# Altium PCB Ad Hoc Node PCB_A.PcbDoc
Units mm, origin at the board's own origin, x right, y up, seen from the top; angles counter-clockwise.
Board outline 152.4 x 101.6 mm, 2 copper layers (Top Layer, Bottom Layer); 35 components, 36 nets, 184 pads, 16 vias.
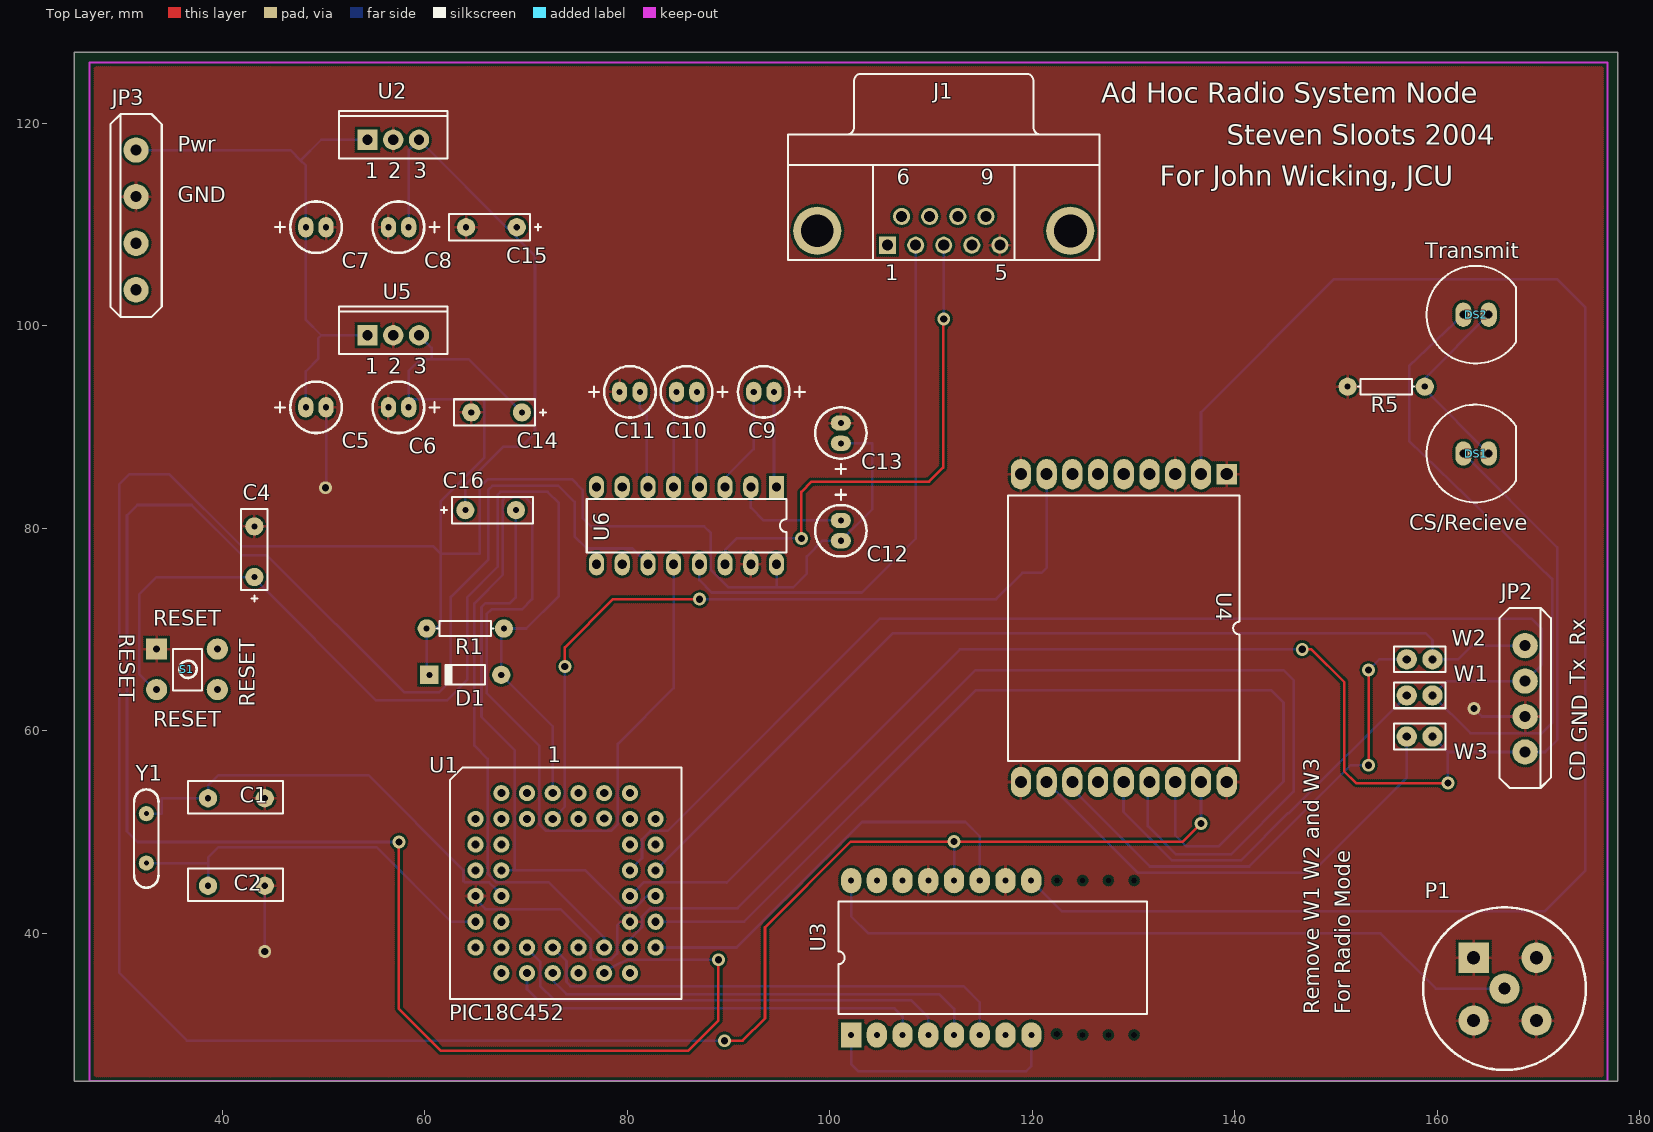
[diagram p0: Top Layer view]
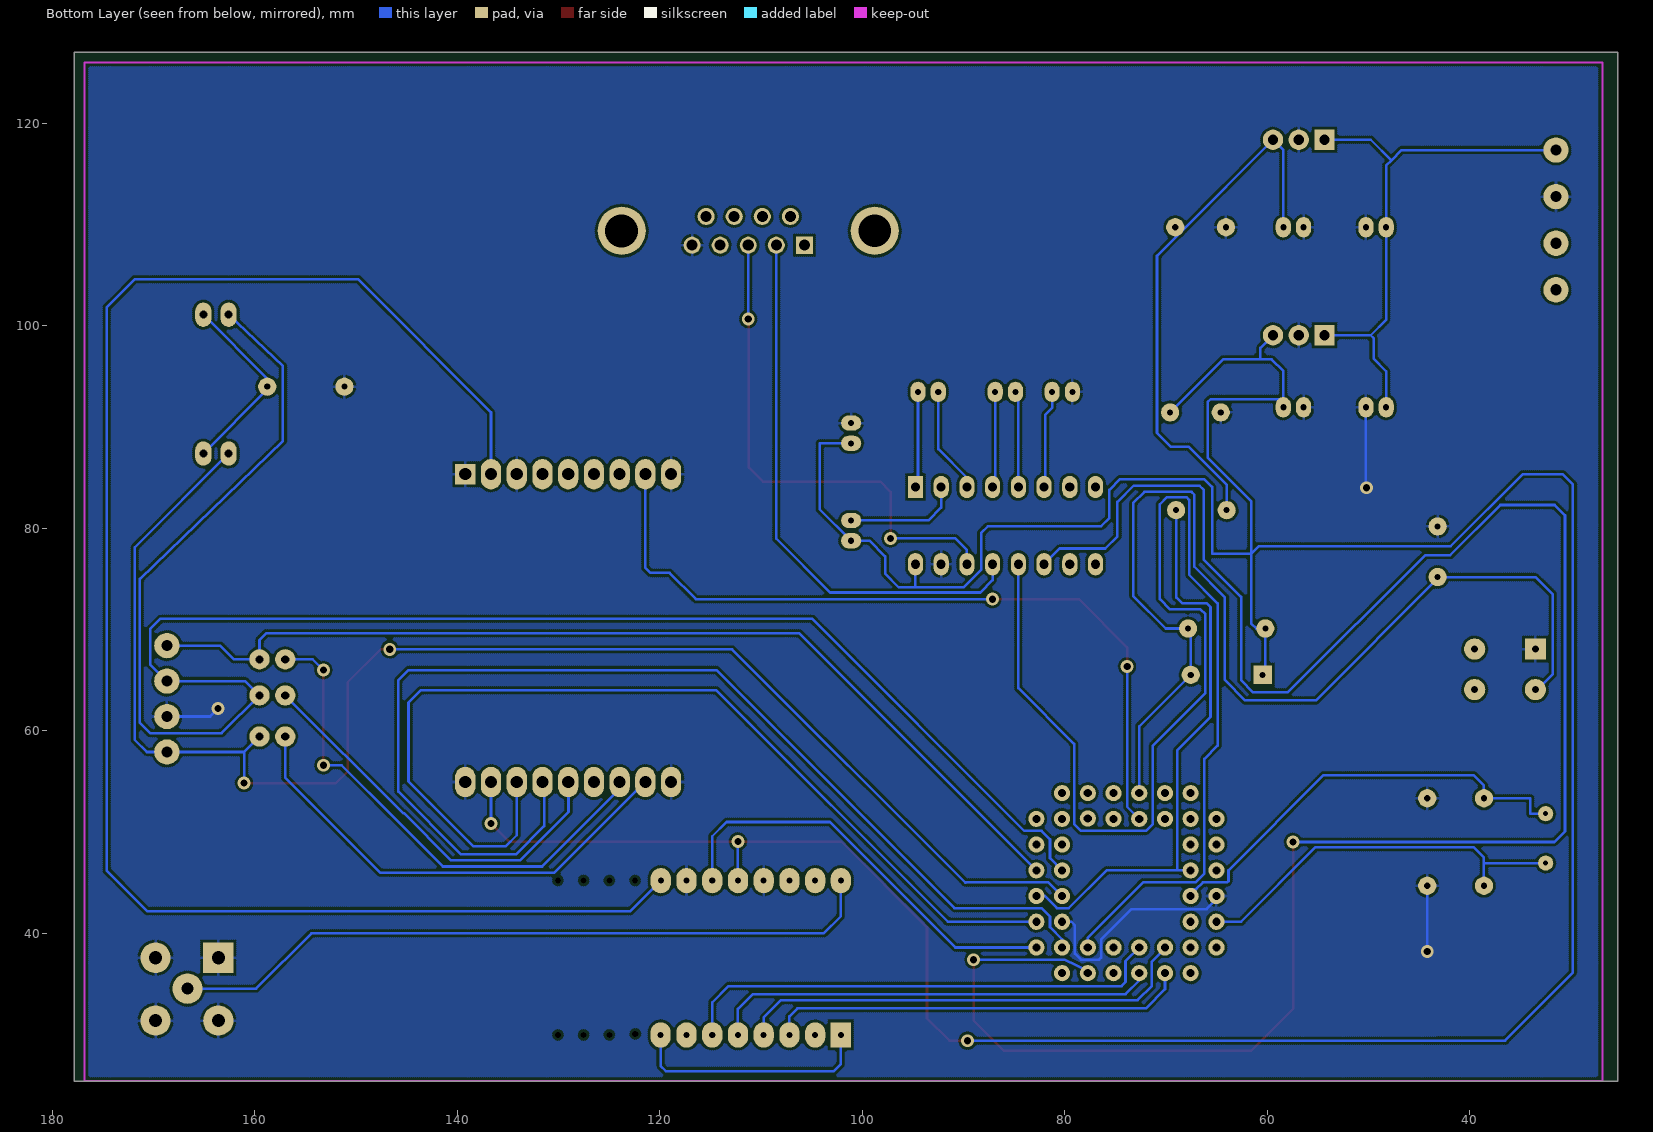
[diagram p1: Bottom Layer view, seen from below]

## Layer stack, top to bottom
Top Layer: signal copper 0.0356
Dielectric: dielectric 0.32, FR-4, Dk 4.8
Bottom Layer: signal copper 0.0356

## Board outline
25.4,25.4 177.8,25.4 177.8,127 25.4,127

## Design rules (kind name [scope] priority, off if disabled: settings)
Clearance [All] p1: gap=0.254
ComponentClearance [All] p1: gap=0.254 collisioncheckmode=0
HoleSize [All] p1: absolutevalues=TRUE maxlimit=5 minlimit=0.025 maxpercent=80.000 minpercent=20.000
PermittedLayers PermittedLayers_1 [All] p1: toplayerpermitted=FALSE bottomlayerpermitted=TRUE
PolygonConnect [All] p1: connectstyle=Relief reliefconductorwidth=0.254 reliefentries=4 polygonreliefangle="90 Angle"
RoutingLayers [All] p1: top layer="Not Used" bottom layer=Any
RoutingVias [All] p1: holewidth=0.711 width=1.27 viastyle="Through Hole" minholewidth=0.711 minwidth=1.27 maxholewidth=0.711 maxwidth=1.27
SolderMaskExpansion [All] p1: expansion=0.102
TestPointUsage [All] p1: valid=0 allowmultiple=FALSE
Testpoint [All] p1: side=15 testpointundercomponent=TRUE minsize=1.016 maxsize=2.54 preferedsize=1.524 minholesize=0 maxholesize=1.016 preferedholesize=0.813 testpointgrid=0.025 style=1023 order=1234567890
Width [All] p1: maxlimit=0.35 minlimit=0.254 preferedwidth=0.254 minimp=50.000000 maximp=50.000000 favimp=50.000000
15 further rules are at their usual default settings.

## Components (designator, comment, footprint, x,y, rotation, side; value= is the part's Value field where it differs from the comment)
C1 "Cap" "5.6mm Ceramic Cap" 38.608,53.34 r0 top
C2 "Cap" "5.6mm Ceramic Cap" 38.608,44.704 r0 top
C4 "0.1uF" "5mm Tant. Cap" 43.18,75.184 r90 top
C5 "Cap" "2mm Pol. Cap" 48.26,91.948 r0 top
C6 "Cap" "2mm Pol. Cap" 58.42,91.948 r180 top
C7 "Cap" "2mm Pol. Cap" 48.26,109.728 r0 top
C8 "Cap" "2mm Pol. Cap" 58.42,109.728 r180 top
C9 "Cap Pol1" "2mm Pol. Cap" 94.488,93.472 r180 top
C10 "Cap Pol1" "2mm Pol. Cap" 86.868,93.472 r180 top
C11 "Cap Pol1" "2mm Pol. Cap" 79.248,93.472 r0 top
C12 "Cap Pol1" "2mm Pol. Cap" 101.092,80.772 r270 top
C13 "Cap Pol1" "2mm Pol. Cap" 101.092,88.392 r90 top
C14 "Cap" "5mm Tant. Cap" 69.596,91.44 r180 top
C15 "Cap" "5mm Tant. Cap" 69.088,109.728 r180 top
C16 "Cap" "5mm Tant. Cap" 64.008,81.788 r0 top
D1 "1N914 Diode" DIO7.1-3.9X1.9 64.008,65.532 r180 top
DS1 "LED1" LED 162.56,87.376 r0 top
DS2 "LED1" LED 162.56,101.092 r0 top
J1 "D Connector 9" DSUB1.385-2H9 111.252,118.872 r0 top
JP2 "Header 4" "4 Way Terminal Block"#1 168.656,57.912 r90 top (schematic designator JP1)
JP3 "Header 4" "4 Way Terminal Block"#2 31.496,117.348 r270 top
P1 "BNC" "PCB BNC Connector - duplicate" 163.576,37.592 r0 top
R1 "Res1" AXIAL-0.3 64.008,70.104 r180 top
R5 "Res1" AXIAL-0.3 154.94,93.98 r180 top
S1 "SW-PB" "Reset Switch - duplicate" 33.528,68.072 r0 top
U1 "PIC18C452/JW" "PIC18C452_PLCC - duplicate" 65.024,53.848 r0 top
U2 "LM340T5.0" SFM-T3/A4.7V 56.896,118.364 r0 top
U3 "AD8369" "24 pin DIP socket for TSSOP" 102.108,29.972 r90 top
U4 "X2010 NBFM Transceiver" X2010 139.192,85.344 r270 top
U5 "LM340T5.0" SFM-T3/A4.7V 56.896,99.06 r0 top
U6 "MAX232EPE" DIP-16/X1.5 85.852,80.264 r180 top
W1 "Tx Jumper" RAD-0.1 159.512,63.5 r180 top
W2 "Rx Jumper" RAD-0.1 159.512,67.056 r180 top
W3 "CD Jumper" RAD-0.1 159.512,59.436 r180 top
Y1 "XTAL" XTAL 32.512,51.816 r270 top

## Footprints (in the part's own frame and the unit in brackets; to place one, negate y for a bottom-side part, rotate by r counter-clockwise, add the part's x,y. Pads: shape width x height; smd on the part's side, far side on the other; paste and mask are expansions set on the pad)
"2mm Pol. Cap" [mm]
  oval 1.5x2 hole 0.6: 1(0,0) 2(2,0)
  silkscreen extent -3.05,-2.54 3.56,2.54
"4 Way Terminal Block"#1 [mm]
  round 2.5 hole 1.1: 0(0,0) 1(3.5,0) 2(7,0) 3(10.5,0)
  silkscreen extent -3.56,-2.54 14.22,2.54
"4 Way Terminal Block"#2 [mm]
  round 2.5 hole 1.1: 1(0,0) 2(4.6,0) 3(9.2,0) 4(13.8,0)
  silkscreen extent -3.56,-2.54 16.5,2.54
"5.6mm Ceramic Cap" [mm]
  round 1.8 hole 0.6: 1(0,0) 2(5.6,0)
  silkscreen extent -2,-1.5 7.4,1.7
"5mm Tant. Cap" [mm]
  round 1.8 hole 0.6: 1(0,0) 2(5,0)
  silkscreen extent -2.4,-1.3 6.7,1.3
"24 pin DIP socket for TSSOP" [mm]
  rect 2.5x2 hole 0.6: 1(0,0)
  oval 2.5x2 hole 0.6: 2(0,-2.54) 3(0,-5.08) 4(0,-7.62) 5(0,-10.16) 6(0,-12.7) 7(0,-15.24) 8(0,-17.8) 9(15.24,0) 10(15.24,-2.54) 11(15.24,-5.08) 12(15.24,-7.62) 13(15.24,-10.16) 14(15.24,-12.7) 15(15.24,-15.24) 16(15.24,-17.78)
  round 0 hole 0.6: ""(0,-22.86) ""(0,-25.4) ""(0,-27.94) ""(0.1,-20.3) ""(15.24,-22.86) ""(15.24,-20.32) ""(15.24,-27.94) ""(15.24,-25.4)
  silkscreen extent 2.08,-29.21 13.16,1.27
AXIAL-0.3 [mm]
  round 1.8 hole 0.6: 1(-3.81,0) 2(3.81,0)
  silkscreen extent -2.77,-0.76 2.77,0.76
DIO7.1-3.9X1.9 [mm]
  round 1.8 hole 0.6: 1(-3.55,0)
  rect 1.8x1.8 hole 0.6: 2(3.55,0)
  silkscreen extent -1.95,-0.95 2.05,0.95
DIP-16/X1.5 [mm]
  rect 1.5x2.2 hole 0.9: 1(-8.89,-3.81)
  oval 1.5x2.2 hole 0.9: 2(-6.35,-3.81) 3(-3.81,-3.81) 4(-1.27,-3.81) 5(1.27,-3.81) 6(3.81,-3.81) 7(6.35,-3.81) 8(8.89,-3.81) 9(8.89,3.81) 10(6.35,3.81) 11(3.81,3.81) 12(1.27,3.81) 13(-1.27,3.81) 14(-3.81,3.81) 15(-6.35,3.81) 16(-8.89,3.81)
  silkscreen extent -9.85,-2.65 9.85,2.65
DSUB1.385-2H9 [mm]
  rect 1.69x1.69 hole 1.09: 1(-5.54,-10.92)
  round 1.69 hole 1.09: 2(-2.77,-10.92) 3(0,-10.92) 4(2.77,-10.92) 5(5.54,-10.92) 6(-4.155,-8.08) 7(-1.385,-8.08) 8(1.385,-8.08) 9(4.155,-8.08)
  round 4.76 hole 3.2: 10(-12.495,-9.5)
  round 4.76 hole 3.26: 11(12.495,-9.5)
  silkscreen extent -15.4,-12.4 15.4,6
LED [mm]
  oval 1.6x2.4 hole 0.8: 1(0,0) 2(2.5,0)
  silkscreen extent -3.62,-4.82 5.2,4.82
"PCB BNC Connector - duplicate" [mm]
  round 3 hole 1.2: 0(3.048,-3.048)
  rect 3x3 hole 1.3: 1(0,0)
  round 3 hole 1.3: 2(6.2,0) 3(0,-6.2) 4(6.2,-6.2)
  silkscreen extent -4.98,-11.08 11.08,4.98
"PIC18C452_PLCC - duplicate" [mm]
  round 1.6 hole 0.8: 1(7.62,0) 2(7.62,-2.54) 3(5.08,0) 4(5.08,-2.54) 5(2.54,0) 6(0,-2.54) 7(2.54,-2.54) 8(0,-5.08) 9(2.54,-5.08) 10(0,-7.62) 11(2.54,-7.62) 12(0,-10.16) 13(2.54,-10.16) 14(0,-12.7) 15(2.54,-12.7) 16(0,-15.24) 17(2.54,-17.78) 18(2.54,-15.24) 19(5.08,-17.78) 20(5.08,-15.24) 21(7.62,-17.78) 22(7.62,-15.24) 23(10.16,-17.78) 24(10.16,-15.24) 25(12.7,-17.78) 26(12.7,-15.24) 27(15.24,-17.78) 28(17.78,-15.24) 29(15.24,-15.24) 30(17.78,-12.7) 31(15.24,-12.7) 32(17.78,-10.16) 33(15.24,-10.16) 34(17.78,-7.62) 35(15.24,-7.62) 36(17.78,-5.08) 37(15.24,-5.08) 38(17.78,-2.54) 39(15.24,0) 40(15.24,-2.54) 41(12.7,0) 42(12.7,-2.5) 43(10.16,0) 44(10.16,-2.54)
  silkscreen extent -2.54,-20.32 20.32,2.54
RAD-0.1 [mm]
  round 2 hole 0.8: 1(0,0) 2(2.54,0)
  silkscreen extent -1.27,-1.27 3.81,1.27
"Reset Switch - duplicate" [mm]
  rect 2.1x2.1 hole 0.7: 1(0,0)
  round 2.1 hole 0.7: 2(0,-4) ""(6,-4) ""(6,0)
  silkscreen extent 1.6,-4.1 4.5,0
SFM-T3/A4.7V [mm]
  rect 2x2 hole 1: 1(-2.54,0)
  round 2 hole 1: 2(0,0) 3(2.54,0)
  silkscreen extent -5.35,-1.85 5.35,2.85
X2010 [mm]
  rect 2x2 hole 1.2: 1(0,0)
  oval 3x2 hole 1.2: 2(0,-2.54) 3(0,-5.08) 4(0,-7.62) 5(0,-10.16) 6(0,-12.7) 7(0,-15.24) 8(0,-17.78) 9(0,-20.32) 10(30.4,-20.32) 11(30.4,-17.78) 12(30.4,-15.24) 13(30.4,-12.7) 14(30.4,-10.16) 15(30.4,-7.62) 16(30.4,-5.08) 17(30.4,-2.54) 18(30.4,0)
  silkscreen extent 2.08,-21.59 28.32,1.27
XTAL [mm]
  round 1.5 hole 0.5: 1(0,0) 2(4.88,0)
  silkscreen extent -2.4,-1.2 7.3,1.2

## Part data
C1 C2 C6 C7 C8 C14 C15 C16: "Capacitor"
C4 C5: library part "Cap Pol1", "Polarized Capacitor (Radial)"
C9 C10 C11 C12 C13: "Polarized Capacitor (Radial)"
D1: library part Diode, "Default Diode"
DS1 DS2: "Typical RED GaAs LED"
J1: "Receptacle Assembly, 9 Position, Right Angle"
JP2: library part "Header 2H", "Header, 2-Pin,  Right Angle"
JP3: "Header, 4-Pin"
P1: "BNC Elbow Connector"
R1 R5: "Resistor"
S1: "Switch"
U1: library part PIC16C74I/JW, "EPROM-Based 8-Bit CMOS Microcontroller with A/D Converter"
U2: library part MC34063AP1, "DC-to-DC Converter Control Circuit"
U3: library part AD8369_DIGITAL_CONT_PWR_AMP
U4: library part NBFM_TRANSCEIVER
U5: "Series 3-Terminal Positive Regulator"
U6: "+5V Powered RS-232 Driver/Receiver"
W1 W2 W3: library part Jumper, "Jumper Wire"
Y1: "Crystal Oscillator"

## Via types
v1: diameter 1.27, hole 0.711, Top Layer to Bottom Layer, 16 vias

## Nets (pads, with @x,y where several pads share a name; then routed paths per layer and width w, separated by ;. In a path a pad name is that pad's centre, name@x,y a point inside that pad or via, vN(x,y) a via of type N, cw(c..) or ccw(c..) an arc to the next point about the centre after c; other vN are vias at no path point)
GND: C1.2 C2.2 C4.2 C5.2 C6.2 C7.2 C8.2 C11.1 C13.2 C14.2 C15.2 J1.5 JP2.1 JP3.2 P1.1 P1.2 P1.3 P1.4 R5.2 S1.1 U1.12 U1.31 U2.2 U3.12 U3.15 U4.1 U4.3 U4.9 U4.10 U4.18 U5.2 U6.15 | length 42.1
  Bottom Layer w0.254: v1(44.208,38.208) C2.2 ; v1(50.2,84) 50.26,84.06 C5.2 ; U1.12 65.024,43.376 66,42.4 73.4,42.4 76.4,39.4 76.4,37.6 76.6,37.4 78.4,37.4 79,38 79,40.8 79.348,41.148 U1.31 ; v1(163.6,62.2) 164.388,61.412 JP2.1
NetC1_1: C1.1 U1.13 Y1.1 | length 44.2
  Bottom Layer w0.254: Y1.1 34.036,51.816 34.036,53.34 C1.1 38.608,54.61 39.624,55.626 54.432,55.626 63.83,46.228 63.83,45.161 63.957,45.034 66.369,45.034 67.03,44.374 67.564,44.374 U1.13
NetC2_1: C2.1 U1.14 Y1.2 | length 38.8
  Bottom Layer w0.254: Y1.2 38.608,46.936 ; C2.1 38.608,46.936 ; U1.14 62.586,41.148 55.22,48.514 39.624,48.514 38.608,47.498 38.608,46.936
NetC4_1: C4.1 D1.1 R1.1 S1.2 U1.1 | length 110.2
  Bottom Layer w0.254: S1.2 33.328,64.072 31.8,65.6 31.8,73.456 33.528,75.184 C4.1 43.18,75.02 55.2,63 62.2,63 64.186,65.024 64.186,73.177 67.208,76.2 67.208,83.312 67.488,83.591 72.136,83.591 73.254,82.474 73.254,73.33 70.028,70.104 R1.1 67.558,69.844 D1.1 ; D1.1@67.767,65.741 D1.1 ; U1.1 72.644,60.446 D1.1
NetC5_1: C5.1 C7.1 JP3.1 U2.1 U5.1 | length 54.6
  Bottom Layer w0.254: JP3.1 46.736,117.348 47.752,116.332 ; C5.1 48.26,95.504 49.505,96.749 49.505,98.781 49.784,99.06 ; U5.1 49.784,99.06 ; U2.1 49.784,118.364 47.752,116.332 ; 47.752,116.332 48.26,115.824 C7.1 48.26,100.584 49.784,99.06
NetC9_1: C9.1 U6.1 | length 9.5
  Bottom Layer w0.254: C9.1 94.488,84.328 U6.1
NetC9_2: C9.2 U6.3 | length 10.6
  Bottom Layer w0.254: U6.3 89.662,84.988 92.488,87.814 C9.2
NetC10_1: C10.1 U6.4 | length 9.5
  Bottom Layer w0.254: C10.1 86.868,84.328 U6.4
NetC10_2: C10.2 U6.5 | length 9.7
  Bottom Layer w0.254: U6.5 84.582,93.218 84.868,93.218 C10.2
NetC11_2: C11.2 U6.6 | length 9.8
  Bottom Layer w0.254: C11.2 81.248,91.897 81.915,91.23 81.915,84.074 U6.6
NetC12_1: C12.1 U6.2 | length 11.4
  Bottom Layer w0.254: U6.2 92.202,82.042 93.472,80.772 C12.1
NetC16_2: C16.2 U1.11 U1.32 | length 57.1
  Bottom Layer w0.254: U1.11 75.87,46.228 79.604,42.494 80.772,42.494 81.966,43.688 U1.32 ; 68.91,46.228 68.91,58.064 65.608,61.366 65.608,72.208 66,72.6 68.4,72.6 68.948,73.148 69.008,73.148 C16.2
NetDS1_1: DS1.1 JP2.0 U1.33 W3.1 | length 150.1
  Top Layer w0.254: v1(146.647,68.047) 147.553,68.047 150.8,64.8 150.8,56 151.964,54.836 v1(161.036,54.836)
  Bottom Layer w0.254: U1.33 81.61,45.034 89.766,45.034 89.8,45 112.847,68.047 v1(146.647,68.047) ; W3.1 161.036,57.912 ; v1(161.036,54.836) 161.036,57.912 ; DS1.1 171.831,78.105 171.831,59.106 170.637,57.912 JP2.0 161.036,57.912
NetDS1_2: DS1.2 DS2.2 R5.1 | length 19
  Bottom Layer w0.254: R5.1@158.75,93.396 R5.1@158.775,93.396 ; DS1.2 158.75,93.686 158.75,94.782 DS2.2
NetDS2_1: DS2.1 JP2.2 U1.35 W1.1 | length 179.8
  Bottom Layer w0.254: U1.35 81.458,47.422 81.458,49.276 82.296,50.114 83.998,50.114 104.953,71.069 169.271,71.069 170.307,70.033 170.307,66.563 JP2.2 160.924,64.912 W1.1 163.246,59.766 170.307,59.766 171.323,60.782 171.323,75.006 157.2,88.6 157.2,96 DS2.1
NetJ1_2: J1.2 U6.13 | length 54.6
  Bottom Layer w0.254: U6.13 87.122,74.879 88.341,73.66 103.175,73.66 108.482,78.967 J1.2
NetJ1_3: J1.3 U6.14 | length 51
  Top Layer w0.254: v1(97.2,79) 97.2,83.6 98.2,84.6 109.8,84.6 111.2,86 v1@111.2,100.6
  Bottom Layer w0.254: U6.14 89.662,77.862 90.8,79 v1(97.2,79) ; v1@111.2,100.6 v1(111.252,100.652) J1.3
NetJP2_3: JP2.3 U1.34 W2.1 | length 98.3
  Bottom Layer w0.254: U1.34 106.197,69.621 158.852,69.621 159.512,68.961 W2.1 162.042,67.056 163.398,68.412 JP2.3
NetP1_1: P1.0 U3.9 | length 71
  Bottom Layer w0.254: U3.9 102.108,41.692 103.8,40 154.4,40 159.856,34.544 P1.0
NetU1_2: U1.2 U4.8 | length 77.5
  Top Layer w0.254: v1(73.838,66.345) 73.838,68.238 78.6,73 v1(87.147,73)
  Bottom Layer w0.254: U1.2 73.838,52.502 v1(73.838,66.345) ; v1(87.147,73) 116.434,73 119.024,75.59 120.904,75.59 121.412,76.098 U4.8
NetU1_19: U1.19 U3.3 | length 41.6
  Bottom Layer w0.254: U1.19 70.104,34.496 72,32.6 106.4,32.6 107.188,31.812 U3.3
NetU1_20: U1.20 U3.4 | length 45.6
  Bottom Layer w0.254: U1.20@70.104,38.496 71.4,37.2 71.4,34.8 72.8,33.4 108,33.4 109.728,31.672 U3.4
NetU1_21: U1.21 U3.5 | length 44.1
  Bottom Layer w0.254: U1.21 72.644,35.356 74,34 110.8,34 112.268,32.532 U3.5
NetU1_22: U1.22 U3.6 | length 48.8
  Bottom Layer w0.254: U1.22 74,37.252 74,35.2 74.4,34.8 113.2,34.8 114.808,33.192 U3.6
NetU1_25: U1.25 U6.11 | length 209.3
  Top Layer w0.254: v1(57.455,49.022) 57.455,32.545 61.6,28.4 86,28.4 89,31.4 v1(89,37.4)
  Bottom Layer w0.254: v1(57.455,49.022) 31.648,49.022 30.607,50.063 30.607,81.28 31.623,82.296 36.982,82.296 41.935,77.343 44.399,77.343 58,63.8 61.4,63.8 62.586,64.999 62.586,73.228 66.294,76.937 66.294,83.82 66.675,84.201 73.199,84.201 74.8,82.6 74.8,79.2 76,78 80.496,78 U6.11 ; U1.25 77.724,36.324 80,37.4 v1(89,37.4)
NetU1_26: U1.26 U6.12 | length 130.6
  Bottom Layer w0.254: U1.26 77.724,39.573 72.263,45.034 67.088,45.034 66.218,45.904 66.218,57.226 64.897,58.547 64.897,72.593 67.716,75.413 67.716,82.804 67.996,83.083 69.901,83.083 70.612,82.372 70.612,73.012 69.6,72 66.6,72 66.116,71.516 66.116,63.729 71.298,58.547 71.298,50.8 71.984,50.114 78.384,50.114 79.07,50.8 79.07,58.699 84.582,64.211 U6.12
NetU1_28: U1.28 U3.14 | length 42.1
  Bottom Layer w0.254: U1.28 90.808,38.608 103.2,51 113.4,51 114.808,49.592 U3.14
NetU1_29: U1.29 U4.15 | length 112
  Bottom Layer w0.254: U1.29 80.264,39.421 81.458,40.615 81.458,41.656 82.296,42.494 90.894,42.494 114.4,66 144.8,66 145.8,65 145.8,54 139.6,47.8 134.2,47.8 131.4,50.6 131.4,55 U4.15@131.456,54.944
NetU1_30: U1.30 U4.16 | length 98.8
  Bottom Layer w0.254: U1.30 91.548,41.148 114.4,64 143.6,64 144.8,62.8 144.8,55 138.4,48.6 135.2,48.6 134.112,49.688 U4.16
NetU3_1: U3.1 U3.8 | length 24.4
  Bottom Layer w0.254: U3.1 102.108,27.092 102.8,26.4 119.4,26.4 119.908,26.908 U3.8@119.908,30.092
NetU3_16: U3.16 U4.2 | length 163.9
  Bottom Layer w0.254: U3.16 122.9,42.2 170.6,42.2 174.6,46.2 174.6,101.8 171.8,104.6 149.8,104.6 136.652,91.452 U4.2
NetU4_11: U4.11 W3.2 | length 47.2
  Bottom Layer w0.254: U4.11 121.456,54.944 130.4,46 147.6,46 156.972,55.372 W3.2
NetU4_12: U4.12 W2.2 | length 50.9
  Top Layer w0.254: v1(153.2,56.6) v1(153.2,66)
  Bottom Layer w0.254: U4.12 123.952,54.248 131.6,46.6 141.4,46.6 146.075,51.275 151.4,56.6 v1(153.2,56.6) ; v1(153.2,66) 154.256,67.056 W2.2
NetU4_14: U4.14 W1.2 | length 39.7
  Bottom Layer w0.254: U4.14 129,54.912 129,52 133.8,47.2 140.6,47.2 145.267,51.867 145.339,51.867 W1.2
VCC: C6.1 C12.2 C13.1 C14.1 D1.2 R1.2 U3.13 U4.17 U5.3 U6.16 | length 347
  Top Layer w0.254: v1(89.6,29.4) 91.4,29.4 93.6,31.6 93.6,40.6 102.068,49.068 134.868,49.068 v1(136.652,50.852)
  Bottom Layer w0.254: C6.1 C6.1@58.42,92.761 ; U5.3 60.693,97.803 60.693,96.672 ; D1.2 60.198,65.532 R1.2 61.087,70.104 61.595,70.612 61.595,82.677 65.888,86.97 65.888,92.456 65.583,92.761 C6.1@58.42,92.761 ; C14.1 64.364,96.672 60.693,96.672 ; v1(89.6,29.4) 36.525,29.413 29.82,36.119 29.82,84.328 30.836,85.344 34.773,85.344 41.885,78.232 60.833,78.232 61.595,77.47 65.456,77.47 65.456,84.074 66.243,84.861 74.539,84.861 75.6,83.8 75.6,81 76.4,80.2 87.6,80.2 88.265,79.535 88.265,75.895 89.992,74.168 96.393,74.168 97.739,75.514 97.739,77.216 99.295,78.772 C12.2 104.191,81.871 104.191,88.392 C13.1 ; 94.742,74.31 U6.16 ; U3.13 v1(112.268,49.068) ; v1(136.652,50.852) U4.17 ; C6.1@58.42,92.761 58.42,95.529 59.563,96.672 60.693,96.672
VDD: C8.1 C15.1 C16.1 U2.3 | length 55
  Bottom Layer w0.254: C8.1 58.42,117.348 U2.3 C15.1@68.58,109.22 ; C16.1 64.008,84.303 67.767,88.062 69.545,88.062 70.891,89.408 70.891,106.909 C15.1@68.58,109.22 ; C15.1 C15.1@68.58,109.22
pads on no net: J1.1 J1.4 J1.6 J1.7 J1.8 J1.9 J1.10 J1.11 JP3.3 JP3.4 S1. U1.3 U1.4 U1.5 U1.6 U1.7 U1.8 U1.9 U1.10 U1.15 U1.16 U1.17 U1.18 U1.23 U1.24 U1.27 U1.36 U1.37 U1.38 U1.39 U1.40 U1.41 U1.42 U1.43 U1.44 U3. U3.2 U3.7 U3.10 U3.11 U4.4 U4.5 U4.6 U4.7 U4.13 U6.7 U6.8 U6.9 U6.10

## Polygon pours and split planes (outlines as drawn)
GND on Top Layer (hatched 90Degree grid 0.2 track 0.3): 27,126 176.8,126 176.8,25.4 27,25.4
GND on Bottom Layer (hatched 90Degree grid 0.2 track 0.3): 27,126 176.6,126 176.6,25.4 27,25.4

## Keep-outs
Keep-Out Layer:
  lines w0.2: 26.924,25.4 176.784,25.4 176.784,125.984 26.924,125.984 26.924,25.4

## Silkscreen, mask and mechanical layers (free items; w line width, h text height)
Top Overlay:
  text "Ad Hoc Radio System Node" at 126.8,122 h2
  text "Steven Sloots 2004" at 139.192,117.856 h2
  text "Pwr" at 35.6,117.2 h1.52
  text "For John Wicking, JCU" at 132.6,113.8 h2
  text "GND" at 35.6,112.2 h1.52
  text "Transmit" at 158.8,106.68 h1.52
  text "CS/Recieve" at 157.2,79.8 h1.52
  text "RESET" at 33.2,70.4 h1.52
  text "RESET" at 29.82,69.6 h1.52 r270
  text "Rx" at 174.6,68.4 h1.52 r90
  text "Tx" at 174.6,64.6 h1.52 r90
  text "RESET" at 43.2,62.4 h1.52 r90
  text "RESET" at 33.2,60.4 h1.52
  text "GND" at 174.8,58.8 h1.52 r90
  text "CD" at 174.6,55 h1.52 r90
  text "Remove W1 W2 and W3" at 148.336,32.004 h1.52 r90
  text "For Radio Mode" at 151.384,32.004 h1.52 r90
  text "PIC18C452" at 62.4,31.4 h1.52

## Text inside footprints (layer, text, board x,y; h text height)
J1: Top Overlay "1" at 105.462,104.497 h1.5; Top Overlay "5" at 116.292,104.497 h1.5; Top Overlay "9" at 114.907,113.897 h1.5; Top Overlay "6" at 106.597,113.897 h1.5
U1: Top Overlay "1" at 72.136,56.896 h1.52
U2: Top Overlay "2" at 56.396,114.539 h1.5; Top Overlay "1" at 54.106,114.539 h1.5; Top Overlay "3" at 58.936,114.539 h1.5
U5: Top Overlay "3" at 58.936,95.235 h1.5; Top Overlay "1" at 54.106,95.235 h1.5; Top Overlay "2" at 56.396,95.235 h1.5